# Altium PCB 2代PCB最终版.PcbDoc
Units mil, origin at the board's own origin, x right, y up, seen from the top; angles counter-clockwise.
Board outline 5567 x 2579 mil, 2 copper layers (Top Layer, Bottom Layer); 121 components, 134 nets, 408 pads, 77 vias.
Unrouted connection lines stored in the file: 58.
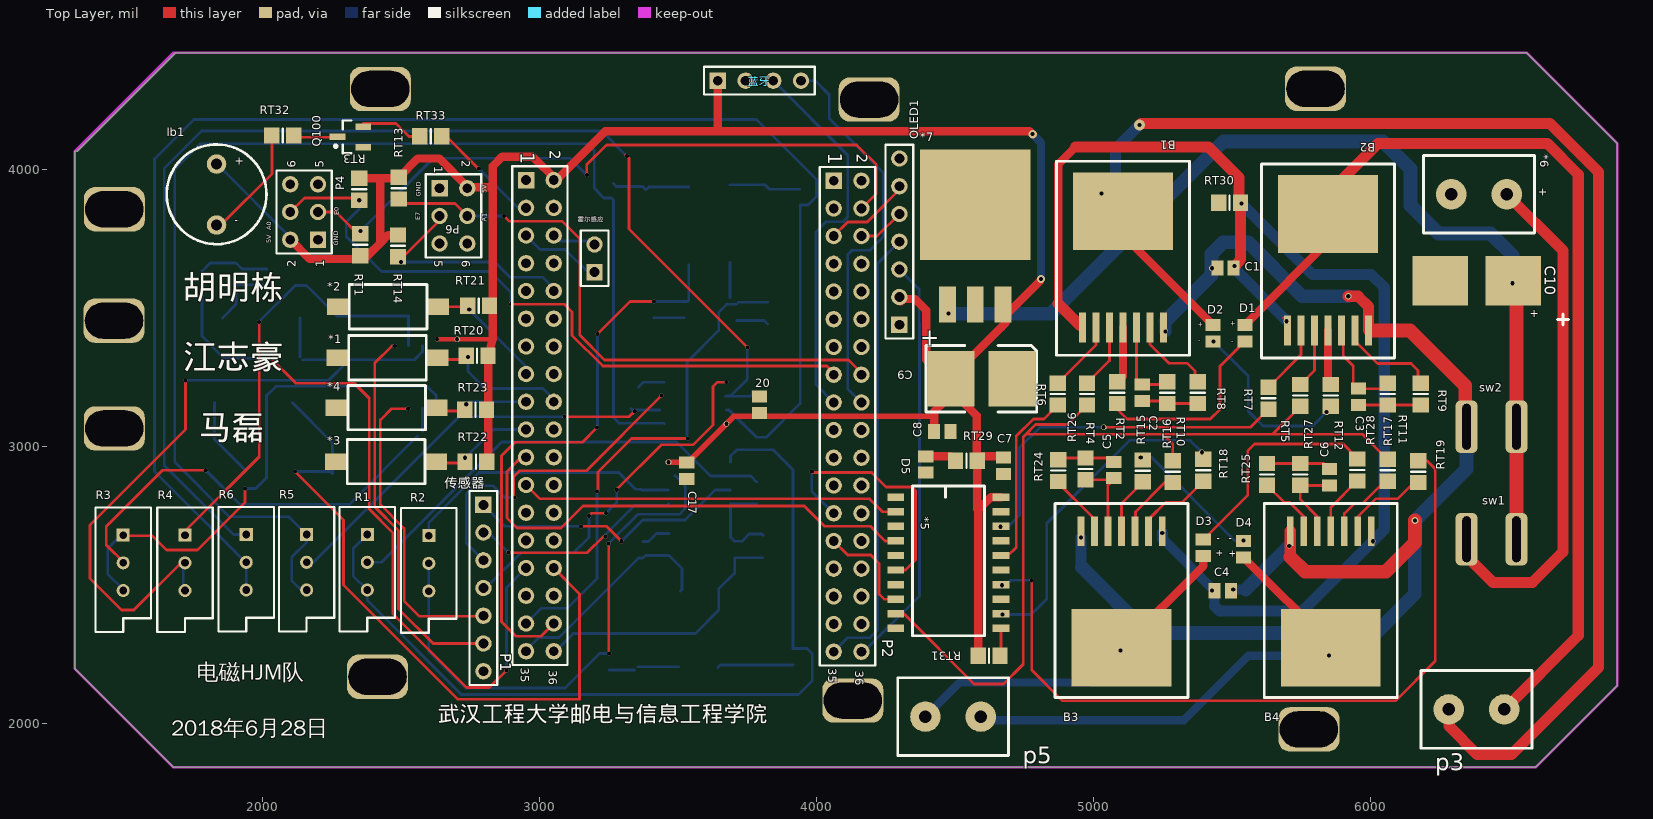
[diagram p0: Top Layer view]
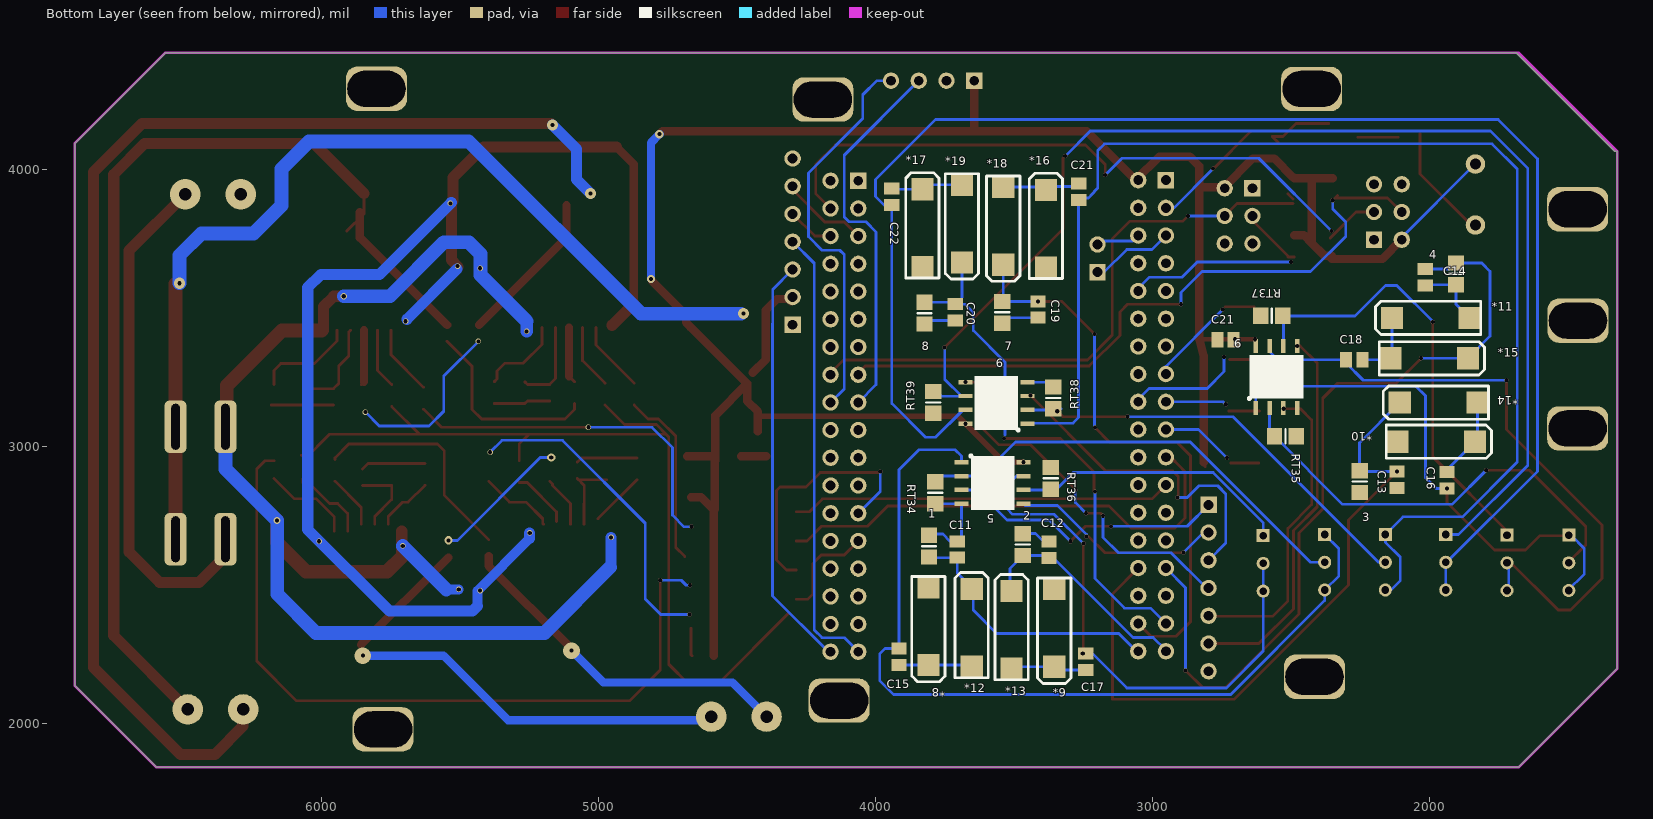
[diagram p1: Bottom Layer view, seen from below]

## Layer stack, top to bottom
Top Layer: signal copper 1.4
Dielectric: dielectric 12.6, FR-4, Dk 4.8
Bottom Layer: signal copper 1.4

## Board outline
1687,4422 1331,4066 1322,4066 1322,2200 1679,1843 6594,1843 6889,2138 6889,4094 6561,4422

## Design rules (kind name [scope] priority, off if disabled: settings)
Clearance [All] p1: gap=10
PolygonConnect [All] p1: connectstyle=Relief reliefconductorwidth=10 reliefentries=4 polygonreliefangle="90 Angle"
RoutingVias [All] p1: holewidth=28 width=50 viastyle="Through Hole" minholewidth=28 minwidth=50 maxholewidth=28 maxwidth=50
SilkscreenOverComponentPads [All] p1: minsilkscreentomaskgap=10
SolderMaskExpansion [All] p1: expansion=4
Width [All] p1: maxlimit=100 minlimit=10 preferedwidth=10
27 further rules are at their usual default settings.

## Components (designator, comment, footprint, x,y, rotation, side; value= is the part's Value field where it differs from the comment)
1 "3.3K" 6-0805_M 3806,2641 r270 bottom
2 "3.3K" 6-0805_M 3467,2647 r270 bottom
3 "3.3K" 6-0805_M 2252,2874 r90 bottom
4 "3.3K" 6-0805_M 1904,3624 r90 bottom
5 "运放1" opa2350 3577,2869 r180 bottom
6 "运放3" opa2350 2552,3252 r90 bottom
7 "3.3K" 6-0805_M 3541,3485 r90 bottom
8 "3.3K" 6-0805_M 3822,3482 r90 bottom
9 "运放2" opa2350 3562,3158 r0 bottom
20 "Cap Po13" C0805 3793,3152 r90 top
*1 "点按钮" 贴片按键 2271,3321 r0 top
*2 "点按钮" 贴片按键 2273,3505 r0 top
*3 "点按钮" 贴片按键 2266,2946 r0 top
*4 "点按钮" 贴片按键 2268,3141 r0 top
*5 "SN74LS244DW" 74lvc 4665,2818 r270 top
*6 "电源接线柱" 接线柱 6390,3911 r180 top
*7 "LM2940" 5vоƬ 4572,3873 r0 top
*8 "二极管" 二极管 3808,2452 r270 bottom
*9 "二极管" 二极管 3354,2446 r270 bottom
*10 "二极管" 二极管 2076,3018 r180 bottom
*11 "二极管" 二极管 1895,3465 r0 bottom
*12 "二极管" 二极管 3652,2246 r90 bottom
*13 "二极管" 二极管 3508,2239 r90 bottom
*14 "二极管" 二极管 1867,3159 r0 bottom
*15 "二极管" 二极管 2101,3319 r180 bottom
*16 "二极管" 二极管 3384,3687 r90 bottom
*17 "二极管" 二极管 3830,3689 r90 bottom
*18 "二极管" 二极管 3538,3897 r270 bottom
*19 "二极管" 二极管 3687,3905 r270 bottom
B1 "*BTN7971N" BTN7971 4965,3420 r0 top
B2 "*BTN7971N" BTN7971 5705,3410 r0 top
B3 "*BTN7971N" BTN7971 5240,2705 r180 top
B4 "*BTN7971N" BTN7971 5995,2705 r180 top
C1 "Cap Pol3" C0805 5475,3645 r0 top
C2 "Cap Pol3" C0805 5175,3195 r270 top
C3 "Cap Pol3" C0805 5955,3180 r270 top
C4 "Cap Pol3" C0805 5465,2480 r180 top
C5 "Cap Pol3" C0805 5072,2916 r90 top
C6 "Cap Pol3" C0805 5850,2890 r90 top
C7 "Cap Pol3" C0805 4674,2931 r270 top
C8 "Cap Pol3" C0805 4453,3055 r0 top
C9 "107钽电容" C107钽电容 4474,3245 r0 top
C10 "107钽电容" "syk220 25v电容" 6613,3599 r180 top
C11 "Cap Pol3" C0805 3704,2629 r90 bottom
C12 "Cap Pol3" C0805 3373,2628 r90 bottom
C13 "Cap Pol3" C0805 2117,2881 r270 bottom
C14 "Cap Pol3" C0805 2015,3612 r270 bottom
C15 "Cap Pol3" C0805 3914,2242 r270 bottom
C16 "Cap Pol3" C0805 1937,2879 r90 bottom
C17 "Cap Pol3" C0805 3240,2224 r270 bottom
C17 "Cap Pol9" C0805 3531,2913 r270 top
C18 "Cap Pol3" C0805 2272,3314 r180 bottom
C19 "Cap Pol3" C0805 3413,3495 r270 bottom
C20 "Cap Pol3" C0805 3711,3485 r270 bottom
C21 "Cap Pol3" C0805 3266,3920 r90 bottom
C21 "Cap Pol3" C0805 2736,3386 r0 bottom
C22 "Cap Pol3" C0805 3940,3902 r90 bottom
D1 "LED2" C0805 5545,3410 r270 top
D2 "LED2" C0805 5430,3410 r270 top
D3 "LED2" C0805 5395,2635 r90 top
D4 "LED2" C0805 5540,2630 r90 top
D5 "LED2" C0805 4393,2936 r270 top
lb1 "点按钮" 喇叭 1834,3811 r90 top
OLED1 "Header 7" HDR1X7 4298,3440 r90 top
P1 "Header 18X2" HDR2X18 2951,3962 r270 top
P2 "Header 18X2" HDR2X18 4061,3960 r270 top
p3 "电源接线柱" 接线柱 6381,2052 r180 top
P4 "编码器" HDR2X3 2200,3747 r90 top
p5 "电源接线柱" 接线柱 4492,2026 r180 top
P6 "编码器" HDR2X3 2639,3933 r270 top
Q100 "QNPN" SOT23_M 2317,4118 r180 top
R1 "RPot" VR5 2378,2583 r270 top
R2 "RPot" VR5 2600,2579 r270 top
R3 "RPot" VR5 1497,2581 r270 top
R4 "RPot" VR5 1720,2581 r270 top
R5 "RPot" VR5 2159,2583 r270 top
R6 "RPot" VR5 1941,2583 r270 top
RT1 "3.3K" 6-0805_M 2352,3729 r270 top
RT2 "3.3K" 6-0805_M 5085,3195 r270 top
RT3 "3.3K" 6-0805_M 2349,3929 r270 top
RT4 "3.3K" 6-0805_M 4975,3190 r90 top
RT5 "3.3K" 6-0805_M 5745,3185 r270 top
RT6 "3.3K" 6-0805_M 4870,3190 r90 top
RT7 "3.3K" 6-0805_M 5630,3175 r270 top
RT8 "3.3K" 6-0805_M 5375,3195 r90 top
RT9 "3.3K" 6-0805_M 6180,3190 r270 top
RT10 "3.3K" 6-0805_M 5265,3195 r90 top
RT11 "3.3K" 6-0805_M 6060,3190 r270 top
RT12 "3.3K" 6-0805_M 5855,3185 r90 top
RT13 "3.3K" 6-0805_M 2492,3933 r270 top
RT14 "3.3K" 6-0805_M 2489,3725 r90 top
RT15 "3.3K" 6-0805_M 5176,2913 r90 top
RT16 "3.3K" 6-0805_M 5285,2910 r270 top
RT17 "3.3K" 6-0805_M 6060,2915 r90 top
RT18 "3.3K" 6-0805_M 5395,2915 r270 top
RT19 "3.3K" 6-0805_M 6170,2910 r90 top
RT20 "3.3K" 6-0805_M 2774,3328 r180 top
RT21 "3.3K" 6-0805_M 2780,3509 r180 top
RT22 "3.3K" 6-0805_M 2770,2946 r180 top
RT23 "3.3K" 6-0805_M 2769,3134 r180 top
RT24 "3.3K" 6-0805_M 4871,2914 r270 top
RT25 "3.3K" 6-0805_M 5625,2900 r90 top
RT26 "3.3K" 6-0805_M 4970,2920 r270 top
RT27 "3.3K" 6-0805_M 5745,2900 r90 top
RT28 "3.3K" 6-0805_M 5950,2916 r270 top
RT29 "3.3K" 6-0805_M 4540,2949 r180 top
RT30 "3.3K" 6-0805_M 5490,3881 r0 top
RT31 "3.3K" 6-0805_M 4622,2246 r180 top
RT32 "3.3K" 6-0805_M 2073,4123 r180 top
RT33 "3.3K" 6-0805_M 2607,4120 r0 top
RT34 "1K" 6-0805_M 3783,2834 r270 bottom
RT35 "1K" 6-0805_M 2520,3038 r180 bottom
RT36 "1K" 6-0805_M 3366,2886 r270 bottom
RT37 "1K" 6-0805_M 2569,3472 r180 bottom
RT38 "1K" 6-0805_M 3357,3176 r90 bottom
RT39 "1K" 6-0805_M 3791,3160 r90 bottom
sw1 "船按钮" 船按键 6345,2566 r0 top
sw2 "船按钮" 船按键 6345,2972 r0 top
传感器 "Header 7" HDR1X7 2797,2790 r270 top
蓝牙 "Header 4" HDR1X4 3643,4321 r0 top
霍尔感应 "Header 2" HDR1X2 3198,3630 r90 top

## Footprints (in the part's own frame and the unit in brackets; to place one, negate y for a bottom-side part, rotate by r counter-clockwise, add the part's x,y. Pads: shape width x height; smd on the part's side, far side on the other; paste and mask are expansions set on the pad)
5vоƬ [mil]
  rect 60x130 smd: 1(-100,-360) 2(0,-360) 3(100,-360)
  rect 400x400 smd: 4(0,0)
6-0805_M [mm] "Chip Res"
  rect 1.4x1.5 smd: 1(-1,0) 2(1,0)
  silkscreen extent 0,-0.65 0,0.65, body extent -1.07,-0.7 1.07,0.7, height 0.7
74lvc [mil]
  rect 26.3x60 smd: 1(0,-380) 2(52.6,-380) 3(105.2,-380) 4(157.8,-380) 5(210.4,-380) 6(263,-380) 7(315.6,-380) 8(368.2,-380) 9(420.8,-380) 10(473.4,-380) 11(473.4,0) 12(420.8,0) 13(368.2,0) 14(315.6,0) 15(263,0) 16(210.4,0) 17(157.8,0) 18(105.2,0) 19(52.6,0) 20(0,0)
  silkscreen extent -40,-320 500,-60
BTN7971 [mil]
  rect 24.4x108 smd: 1(-6.4,10) 2(42.4,10) 3(91.2,10) 4(140,10) 5(188.8,10) 6(237.6,10) 7(286.4,10)
  rect 360x280 smd: 8(140,430)
  silkscreen extent -100,-90 380,610
C107钽电容 [mil]
  rect 170x200 smd: 1(11,0) 2(231,0)
  silkscreen extent -80,-120 320,120
C0805 [mm] "Chip Capacitor, Body 2.0x1.3"
  rect 1.1x1.4 smd: 1(-0.75,0) 2(0.75,0)
  body extent -1.1,-0.72 1.1,0.72, height 1.4
HDR1X2 [mm]
  rect 1.5x1.5 hole 0.9: 1(0,0)
  round 1.5 hole 0.9: 2(2.54,0)
  silkscreen extent -1.27,-1.27 3.81,1.27
HDR1X4 [mm]
  rect 1.5x1.5 hole 0.9: 1(0,0)
  round 1.5 hole 0.9: 2(2.54,0) 3(5.08,0) 4(7.62,0)
  silkscreen extent -1.27,-1.27 8.89,1.27
HDR1X7 [mm]
  rect 1.5x1.5 hole 0.9: 1(0,0)
  round 1.5 hole 0.9: 2(2.54,0) 3(5.08,0) 4(7.62,0) 5(10.16,0) 6(12.7,0) 7(15.24,0)
  silkscreen extent -1.27,-1.27 16.51,1.27
HDR2X3 [mm]
  rect 1.5x1.5 hole 0.9: 1(0,0)
  round 1.5 hole 0.9: 2(0,2.54) 3(2.54,0) 4(2.54,2.54) 5(5.08,0) 6(5.08,2.54)
  silkscreen extent -1.27,-1.27 6.35,3.81
HDR2X18 [mm]
  rect 1.5x1.5 hole 0.9: 1(0,0)
  round 1.5 hole 0.9: 2(0,2.54) 3(2.54,0) 4(2.54,2.54) 5(5.08,0) 6(5.08,2.54) 7(7.62,0) 8(7.62,2.54) 9(10.16,0) 10(10.16,2.54) 11(12.7,0) 12(12.7,2.54) 13(15.24,0) 14(15.24,2.54) 15(17.78,0) 16(17.78,2.54) 17(20.32,0) 18(20.32,2.54) 19(22.86,0) 20(22.86,2.54) 21(25.4,0) 22(25.4,2.54) 23(27.94,0) 24(27.94,2.54) 25(30.48,0) 26(30.48,2.54) 27(33.02,0) 28(33.02,2.54) 29(35.56,0) 30(35.56,2.54) 31(38.1,0) 32(38.1,2.54) 33(40.64,0) 34(40.64,2.54) 35(43.18,0) 36(43.18,2.54)
  silkscreen extent -1.27,-1.27 44.45,3.81
opa2350 [mil]
  rect 50x16 smd: 1(-112,75) 2(-112,25) 3(-112,-25) 4(-112,-75) 5(112,-75) 6(112,-25) 7(112,25) 8(112,75)
  silkscreen extent -82,-98 79,102
SOT23_M [mm] "SOT23, 3-Leads, Body 2.9x1.3mm, Pitch 0.95mm, Lead Span 2."
  rect 1.45x0.6 smd: 1(1.175,0) 2(-1.175,-0.95) 3(-1.175,0.95)
  silkscreen extent -0.1,-1.5 1.47,1.5, body extent -0.7,-1.5 0.7,1.5, height 1.1
"syk220 25v电容" [mil]
  rect 200x180 smd: 1(100,0) 2(363,0)
  silkscreen extent -100,120 -60,160
VR5 [mm]
  rect 1.2x1.2 hole 0.7: 1(-2.54,0)
  round 1.2 hole 0.7: 2(0,0) 3(2.54,0)
  silkscreen extent -5.08,-2.54 6.35,2.54
二极管 [mil]
  rect 80x80 smd: 1(-40,0) 2(240,0)
  silkscreen extent -80,-60 300,60
喇叭 [mil]
  round 70 hole 40: 1(-11,0) 2(209,0)
  silkscreen extent -80,-180 280,180
接线柱 [mil]
  round 110 hole 45: 1(-100,0) 2(100,0)
  silkscreen extent -200,-140 200,140
船按键 [mil]
  rrect50% 80x190 hole 30 slot 165 at 90 deg: 1(0,100) 2(180,100)
贴片按键 [mil]
  rect 80x60 smd: 1(0,0) 2(360,0)
  silkscreen extent 40,-80 320,80

## Part data
1 2 3 4 7 8 RT1 RT2 RT3 RT4 RT5 RT6 RT7 RT8 RT9 RT10 RT11 RT12 RT13 RT14 RT15 RT16 RT17 RT18 RT19 RT20 RT21 RT22 RT23 RT24 RT25 RT26 RT27 RT28 RT29 RT30 RT31 RT32 RT33 RT34 RT35 RT36 RT37 RT38 RT39: library part "Res Thermal", "Thermis"
5 6 9: library part Co
20 C17: library part "Cap Pol3", "Polarized Capacitor (Surface Mount)"
B1 B2 B3 B4: library part BTN7971N
C1 C2 C3 C4 C5 C6 C7 C8 C11 C12 C13 C14 C15 C16 C17 C18 C19 C20 C21 C21 C22: "Polarized Capacitor (Surface Mount)"
D1 D2 D3 D4 D5: "Typical RED, GREEN, YELLOW, AMBER GaAs LED"
OLED1: "Header,"
P1 P2: "Header, 18-Pin"
P4 P6: library part "Header 3X2", "Header, 3-Pin"
Q100: "NPN Bipolar Transistor"
R1 R2 R3 R4 R5 R6: "Pote"
蓝牙: "He"

## Free pads (board coordinates)
  rrect50% 220x160 hole 130 slot 210 at 0 deg: 0(5800,4292) 3(4189,4253) 4(2425,4291) 5(2415,2170) 6(4130,2084) 7(5776,1980) 8(1465,3857) 9(1464,3455) 10(1465,3066)

## Via types
v1: diameter 15, hole 15, Top Layer to Bottom Layer, 47 vias
v2: diameter 20, hole 15, Top Layer to Bottom Layer, 18 vias
v3: diameter 40, hole 15, Top Layer to Bottom Layer, 4 vias
v4: diameter 30, hole 15, Top Layer to Bottom Layer, 4 vias
v5: diameter 60, hole 15, Top Layer to Bottom Layer, 2 vias
v6: diameter 25, hole 15, Top Layer to Bottom Layer, 2 vias

## Nets (pads, with @x,y where several pads share a name; then routed paths per layer and width w, separated by ;. In a path a pad name is that pad's centre, name@x,y a point inside that pad or via, vN(x,y) a via of type N, cw(c..) or ccw(c..) an arc to the next point about the centre after c; other vN are vias at no path point)
3V3: P2.1
5V: 5.8 6.8 9.8 20.1 *5.20 *7.3 C7.1 C8.1 C9.1 C17.1@3531,2942.53 C21.1@2706.47,3386 lb1.2 OLED1.2 P1.2 P4.2 P6.2 RT1.2 RT3.1 RT13.1 RT14.2 RT20.1 RT21.1 RT22.1 RT23.1 RT29.1 RT31.2 蓝牙.1 | length 9086.9
  Top Layer w10: RT13.1@2488,3968.37 RT13.1 ; RT22.1 2809.37,2929 RT22.1@2820,2939.63 ; 2829.77,3388 2831,3388 ; RT29.1 RT29.1@4595.9,2965.53 ; *5.20@4664,2819 *5.20 ; 4675,3425 4675,3441 *7.3@4675,3481 ; C7.1@4679,2965.53 C7.1@4679.53,2965
  Top Layer w15: v1(2629,3388) 2829.77,3388
  Top Layer w20: v2(3465,2944) 3535,2944 v2(3674,3083) 3701,3110 4421,3110
  Top Layer w30: P4.2 2169.37,3677.63 RT1.2@2353,3677.63 ; RT3.1 RT13.1@2488,3968.37 ; RT1.2 2379.63,3689.63 2425,3735 ; 2425,3964.37 2425,3735 ; RT14.2@2488,3763.37 2453.37,3763.37 2425,3735 ; RT13.1 2559.63,4040 2638,4040 2742,3936 2831,3936 ; RT22.1@2815,2943 2815,3328 2829.77,3388 2831,3393 ; 2831,3388 2831,3393 ; 3643,4144 蓝牙.1 ; OLED1.2@4304,3525 4312,3533 4355,3533 4395,3493 4395,3314 C9.1@4442,3267 ; C8.1 4423.47,3126.42 4462,3164.95 C9.1@4462,3228 ; RT29.1@4577,2949 4577,3113 C9.1@4462,3228 ; 4579.37,2774.89 RT29.1 ; RT31.2 4582.63,2771.63 4629,2818 *5.20 ; RT29.1@4595.9,2965.53 C7.1@4679,2965.53 ; v4(4779,4128) 4768,4139 3237,4139 3060,3962 2975,4047 2865,4047 2831,4013 2831,3936 ; v4@4805.5,3597.5 4683,3475 4683,3449 4675,3441 C9.1@4462,3228 ; 2831,3393 2831,3936
  Bottom Layer w10: lb1.2@1834,4011 1844,4011 2100,3755 P4.2
  Bottom Layer w30: v4(4779,4128) 4778,4128 4809,4097 v4(4809,3605)
  other v2: 2702,3388
A0: P2.15 P4.4 RT3.2 | length 2479.5
  Top Layer w10: P4.4 2151,3898 2340.63,3898 RT3.2@2332.1,3906.53 ; RT3.2@2347.57,3893 2345.63,3893 v1(2349,3889.63) ; v1@2895,3516 v1(2897,3514) 3089,3514 3117,3486 3117,3402 3228,3291 4036,3291 P2.15@4061,3266
  Bottom Layer w10: v1(2349,3889.63) 2349,3858 2302,3811 2302,3759 2429,3632 2821,3632 2897,3556 v1(2897,3514) ; P2.15@4070,3251 P2.15@4070,3260
A1: P2.16 P6.4 RT13.2 | length 2164.6
  Top Layer w10: RT13.2@2492,3877.53 2694.47,3877.53 P6.4 ; RT13.2 RT13.2@2510.9,3912.53 ; v1(2871,3833) 2890,3814 3080,3814 3145,3749 3145,3402.28 3234.28,3313 4114.53,3313 P2.16@4170,3257.53
  Bottom Layer w10: P6.4 v1(2871,3833)
A2: P2.17 蓝牙.3 | length 1382.3
  Bottom Layer w10: 蓝牙.3 4112,4052 4112,3829 4095,3812 4034,3812 3997,3775 3997,3224 P2.17
A3: P2.18 蓝牙.4 | length 1425.5
  Bottom Layer w10: 蓝牙.4 3994,4321 4045,4270 4045,4184 4241,3988 4241,3758 4192,3709 4128,3709 4112,3693 4112,3209 P2.18
A4: P2.2
A6: P2.29
A7: P2.30
B0: P2.33
B1: P2.34
B2: OLED1.3 P2.36 | length 1500.7
  Bottom Layer w10: P2.36 4169.28,2260 4371,2461.72 4371,3445 ; OLED1.3 4370,3568 4370,3446
B3: OLED1.4 P2.35 | length 1625
  Bottom Layer w10: P2.35 4112,2311 4192,2311 4220,2339 4220,3662 OLED1.4
B4: P1.22
B5: P1.20
C0: 3.2 *14.2 C13.1 P1.30 | length 2471.3
  Top Layer w10: v1(2117,2910.53) 2292,2735.53 2292,2501 2704,2089 3144,2089 3144,2469 P1.30
  Bottom Layer w10: *14.2 2252,3014 3.2 2252,2902.37 2243.84,2910.53 v1(2117,2910.53)
C1: 4.2 *15.2 C14.1 P1.29 | length 2943.9
  Top Layer w10: v1(2030,3319) 2120,3229 2331,3229 2385,3175 2385,2775 2471,2689 2471,2396 2736,2131 2818,2131 v1(2880,2193)
  Bottom Layer w10: C14.1 1925.84,3641.53 4.2 1811.37,3663.37 1781,3633 1781,3399 *15.2 v1(2030,3319) ; v1(2880,2193) 2880,2491 P1.29
C2: *5.2 P1.23 | length 1385
  Top Layer w10: P1.23 3001,2812 4190,2812 4236.6,2765.4 *5.2 ; P1.23@2960,2862 P1.23@2960,2872.94
C3: *5.4 P1.21 | length 1760.5
  Top Layer w10: P1.21 2933.72,2962 2898.24,2926.53 2898.19,2926.53 2886.47,2914.81 2886.47,2914.76 2882.47,2910.76 2882.47,2742.53 2918.47,2706.53 3076.71,2706.53 3156.18,2786 3955,2786 4028,2713 4194,2713 4246.8,2660.2 *5.4
C4: P2.8
C5: P2.7
C6: P2.13
C7: P2.14
D0: P1.6 霍尔感应.2 | length 160.3
  Bottom Layer w10: P1.6 3071,3742 3186,3742 霍尔感应.2
D1: P1.5 霍尔感应.1 | length 301.7
  Bottom Layer w10: P1.5 3001,3712 3092,3712 3174,3630 霍尔感应.1
D2: P2.19
D3: P2.20
D4: P2.21
D5: P1.26
D6: P1.25
D7: P1.24
E0: P2.4 P4.3 RT1.1 | length 2470.2
  Top Layer w10: P4.3 2264.37,3847 RT1.1@2358,3753.37 ; v1(3170,3980) 3170,4018 3241,4089 4144,4089 4215,4018 4215,3914 P2.4
  Bottom Layer w10: v1(2353,3778) 2616,4041 3109,4041 v1(3170,3980)
E1: P2.3
E2: P1.4
E3: P1.3 RT33.2 | length 417.7
  Top Layer w10: RT33.2@2645.37,4137 2778.37,4004 v1(2781,4004)
  Bottom Layer w10: v1@2782,4002 2922,3862 P1.3
E4: P2.28
E5: *3.2 P1.19 RT22.2 | length 371.9
  Top Layer w10: *3.2@2616,2941 RT22.2@2716.63,2941
  Bottom Layer w10: v1(2731,2960) 2833,3062 P1.19@2960,3062
E6: *4.2 P1.17 RT23.2 | length 340.4
  Top Layer w10: *4.2@2613,3129 RT23.2@2724.63,3129
  Bottom Layer w10: v1(2735,3153) 2744,3162 P1.17@2960,3162
E7: P1.10 P6.3 RT14.1 | length 823.3
  Top Layer w10: RT14.1@2488,3684.63 RT14.1@2510.63,3684.63 ; RT14.1@2507,3685 P6.3@2646,3824
  Bottom Layer w10: v1(2499,3667) 2838,3667 2892,3613 ; 2892,3612 3010,3612 P1.10@3060,3562
EN: *5.9 RT4.1 RT5.2 RT16.1 RT17.2 | length 3264.4
  Top Layer w10: *5.9@4314.8,2397.2 4568,2144 4674,2144 4745,2215 4745,3035 4755,3045 ; RT4.1 4904.37,3080 4790,3080 4755,3045 ; RT16.1 5285,3010 5250,3045 ; RT5.2 5644.37,3045 ; RT17.2 5969.37,3045 5644.37,3045 ; RT17.2@6065,2964.37 RT17.2@6070,2969.37 ; 4755,3045 5250,3045 ; 5250,3045 5644.37,3045
F0: P2.22
F1: P2.23
F2: P2.31
F3: P2.32
F4: 1.2 *12.2 C11.1 P1.36 | length 969.6
  Bottom Layer w10: P1.36 3057.07,2262 3121.07,2326 3562,2326 3646,2410 3646,2486 3704,2544 C11.1 1.2@3803.84,2599.47
F5: 2.2 *13.2 C12.1 P1.35 | length 812.1
  Bottom Layer w10: P1.35 2951,2266 2997,2312 3070,2312 3356.47,2598.47 C12.1 3382.16,2607.63 2.2 3514,2560.63 3514,2485 *13.2
F6: 7.2 *18.2 C19.1 P1.34 | length 2058.2
  Top Layer w10: P1.34 3005,2316 2915,2316 2862.47,2368.53 2862.47,2967.47 2911,3016 3154,3016 v1(3207,3069) ; v1(3209,3407) 3326.53,3524.53 v1(3413,3524.53)
  Bottom Layer w10: v1(3207,3069) 3209,3071 v1(3209,3407) ; v1(3413,3524.53) 7.2@3535.16,3524.53 ; 7.2@3538,3527.37 *18.2
F7: 8.2 *19.2 C20.1 P1.33 | length 1879.7
  Top Layer w10: v1@3211,2839 3211,2909 3332,3030 v1(3535,3030)
  Bottom Layer w10: P1.33 3006.47,2417.47 3100.47,2417.47 3207,2524 v1(3207,2839) ; 3532,3042 3532,3305 3646,3419 3646,3484 3676.53,3514.53 C20.1 ; 3687,3538.53 *19.2 ; C20.1@3717.84,3521.37 8.2
G0: P2.9
G1: P2.10
G2: P2.11
G3: P2.12
G4: P2.24
G5: P2.26
G6: *5.6 P2.25 | length 921.8
  Top Layer w10: v1(3982,2910) 3985.18,2906.82 4198.18,2906.82 4250,2855 4343,2855 4356,2842 4356,2591 4320,2555 *5.6
  Bottom Layer w10: v1(3982,2910) 3982,2839 P2.25
G7: *5.8 P2.27 | length 386.1
  Top Layer w10: P2.27 4112,2609 4195,2609 4225,2579 4225,2468 4243.2,2449.8 *5.8 ; P2.27@4070,2660 P2.27@4070,2670
GND: 1.1 2.1 3.1 4.1 5.4 6.4 7.1 8.1 9.4 20.2 *1.1 *2.1 *3.1 *4.1 *5.1 *5.3 *5.5 *5.7 *5.10 *5.13 *5.15 *5.17 *5.19 *6.2 *7.2 *7.4 *8.1 *9.1 *10.1 *11.1 *16.1 *17.1 C2.2 C3.2 C5.2 C6.2 C7.2 C8.2 C9.2 C10.2 C11.2 C12.2 C13.2 C14.2 C17.2@3531,2883.47 C19.2 C20.2 C21.2@2765.53,3386 D5.2 OLED1.1 OLED1.7 P1.1 P4.1 P6.1 Q100.3 RT8.1 RT9.2 RT10.1 RT11.2 RT24.1 RT25.2 RT26.1 RT27.2 RT30.1 RT34.2 RT35.2 RT36.1 RT37.1 RT38.2 RT39.1 传感器.7 蓝牙.2 | length 1913.2
  Top Layer w10: RT24.1@4860,2959.37 RT26.1 5060.16,2959.37 C5.2@5075,2944.53 ; C2.2 5255.16,3165.47 RT10.1 RT8.1 ; RT25.2 RT27.2 5830.16,2939.37 C6.2 ; C3.2 RT9.2@6179.84,3150.47
  Bottom Layer w10: *11.1 1904,3514 4.1 C14.2@2012.84,3584.63 ; RT38.2 3374.63,3233 9.4 ; C12.2 3392.53,2657.53 3422,2687 3466.37,2687 2.1 ; C19.2 7.1@3521.16,3465.47 ; C20.2 3809.16,3455.47 8.1 ; RT34.2@3782.37,2794 5.4 3689,2673.53 C11.2 3729.53,2658.53 3756,2685 3801.37,2685 1.1
GND1: B1.1 B2.1 B3.1 B4.1 C1.2 C4.2 RT30.2 | length 4546.6
  Top Layer w10: RT30.2@5524,3886.37 RT30.2 ; 5684,3465 5695,3454 v2(5695,3453)
  Top Layer w30: 4871,3517.6 4871,4019 4934,4082
  Top Layer w40: 4871,3517.6 B1.1@4950.3,3438.3 ; 4934,4082 5413,4082 5524,3971 RT30.2@5524,3886.37 ; C1.2@5505,3649 5529.37,3673.37 RT30.2
  Bottom Layer w35: 5247,2668.47 5435.47,2480 5435.47,2425.53
  Bottom Layer w40: 5247,2668.47 v2(5247,2689) ; 5435.47,2425.53 5454,2407 5753,2407 6048,2702 6048,3574 6000,3622 5789,3622 v2@5530,3881 ; 5509,3641 v2@5690,3460
  other v2: 5426,2481 6007,2659 5507,3652 5533,3878
H0: *1.2 P1.18 RT20.2 | length 507.8
  Top Layer w10: *1.2@2631,3315 RT20.2@2721.63,3315
  Bottom Layer w10: v1(2741,3324) 2741,3271 2802,3210 3012,3210 P1.18@3060,3162
H1: *2.2 P1.15 RT21.2 | length 421.5
  Top Layer w10: *2.2 RT21.2@2736.63,3505
  Bottom Layer w10: v1(2746,3495) 2951,3290 P1.15
H2: P1.11
H3: P1.32
H4: P1.31
H5: P1.9
H6: P1.8
H7: P1.7
I0: P1.16
I1: P1.13
I2: OLED1.5 P2.6 | length 170.1
  Top Layer w10: P2.6 4218,3760 OLED1.5
I3: OLED1.6 P2.5 | length 315.4
  Top Layer w10: P2.5 4112,3811 4182,3811 OLED1.6@4304.5,3933.5
I4: P1.14
I5: P1.27
I6: P1.28
IN1: *5.18 RT7.2 | length 1285.8
  Top Layer w10: v2(5035,3070) 5564.37,3070 RT7.2
  Bottom Layer w10: v1(4663,2711) 4690,2711 4732,2753 4732,2997 4805,3070 v2(5035,3070)
IN2: *5.16 RT6.1 | length 644.5
  Top Layer w10: *5.16@4687,2604 4720,2637 4720,3038.28 4781.72,3100 4819.37,3100 RT6.1
IN3: *5.14 RT19.2 | length 2767.7
  Top Layer w10: v1(4776,2518) 4776,2194 4887,2083 6088,2083 6232,2227 6232,2919 6201.63,2949.37 RT19.2
  Bottom Layer w10: v1(4668,2500) 4682,2500 4700,2518 v1(4776,2518)
IN4: *5.12 RT18.1 | length 1157.9
  Bottom Layer w10: v1(4670,2395) 4774,2395 4830,2451 4830,2724 5129,3023 5347,3023 v2(5390,2980)
INP1: 5.3 传感器.1 | length 1015.3
  Top Layer w10: 3157,2713 3241,2713 v1(3295,2659)
  Bottom Layer w10: 传感器.1 2874,2713 3148,2713 v1(3149,2712) ; v1(3295,2659) 3372,2736 3524.28,2736 3632.28,2844 5.3
INP2: 5.5 传感器.2 | length 775
  Top Layer w10: v1@2888,2617.47 3171.47,2617.47 3230,2676 v1(3237,2676)
  Bottom Layer w10: 传感器.2 2816,2690 v1(2888,2618) ; v1(3237,2676) 3237,2683 3342,2788 3459,2788 5.5
INP3: 9.3 传感器.3 | length 1199.3
  Top Layer w10: v1@2906.53,2817 2906.53,2843.5 2906.47,2843.56 2906.47,2880.44 2906.53,2880.5 2906.53,2892.53 2927,2913 3168,2913 v1(3440,3185)
  Bottom Layer w10: 传感器.3 2735,2652 2735,2830 2764,2859 2832,2859 2874,2817 v1(2909,2817)
INP4: 9.5 传感器.4 | length 1338.2
  Top Layer w10: v1(3178,2751) 3187,2760 v1(3239,2760) ; v1(3278,2845) 3440.5,3007.5 3554.5,3007.5 3626,3079 3626,3217 3642,3233 v1(3674,3233)
  Bottom Layer w10: 传感器.4 2804.82,2490 2932.29,2617.47 3122.47,2617.47 3178,2673 v1(3178,2751) ; v1(3239,2760) 3278,2799 v1(3278,2845)
INP5: 6.3 传感器.5 | length 1116.8
  Top Layer w10: v1(2526,3137) 2465,3137 2425,3097 2425,2791.57 2511,2705.57 2511,2443 2566,2388 2795,2388 传感器.5
INP6: 6.5 传感器.6 | length 1378.1
  Top Layer w10: v1(2477,3364) 2467,3364 2405,3302 2405,2783.28 2491,2697.28 2491,2415 2616,2290 传感器.6
Net5_1: 5.1 C15.1 R1.1 R1.3 | length 3153.3
  Bottom Layer w10: R1.1 2327,2632 2327,2534 R1.3 2378,2445 2717,2106 3934,2106 3984,2156 3984,2252 3964.47,2271.53 C15.1 3914,2917 3842,2989 3712,2989 3689,2966 5.1
Net5_2: 5.2 R1.2 RT34.1 | length 1645.1
  Bottom Layer w10: R1.2 2429.54,2583 2580,2733.46 2580,2734.28 2863.19,3017.47 3493.53,3017.47 3617,2894 5.2 3762.37,2894 RT34.1
Net5_6: 5.6 R2.1 RT36.2 | length 1006.7
  Bottom Layer w10: R2.1@2600,2685 2600,2726 2780.53,2906.53 3285.47,2906.53 3345.37,2846.63 RT36.2 3368.63,2844 5.6
Net5_7: 5.7 C17.1@3240,2253.53 R2.2 R2.3 | length 1941.5
  Top Layer w10: v1(3249,2651) 3249,2255.53 v1(3251,2253.53)
  Bottom Layer w10: R2.2@2600,2585 R2.2 R2.3 2600,2262 2733,2129 3092,2129 3216.53,2253.53 v1(3251,2253.53) ; v1(3249,2651) 3354,2756 3504,2756 3525,2777 3525,2805 3525,2859 5.7@3488,2896
Net6_1: 6.1 C16.1 R3.1 R3.3 | length 1912.1
  Top Layer w10: R3.1@1503,2679 1601,2679 1653,2627 1765,2627 1937,2799 v1(1937,2849.47)
  Bottom Layer w10: R3.3@1503,2479 1441,2541 1441,2632 1488,2679 R3.1@1503,2679 ; v1(1937,2849.47) 1975.47,2849.47 2014,2888 2014,3184 2048,3218 2594,3218 2627,3185 6.1
Net6_2: 6.2 R3.2 RT35.1 | length 1605.4
  Top Layer w10: R3.2@1503,2579 1436,2646 1436,2712 1639,2915 v1(1795,2915)
  Bottom Layer w10: v1(1795,2915) 1917.93,2792.07 2313.44,2792.07 RT35.1 ; RT35.1@2577,3055.63 6.2
Net6_6: 6.6 R4.1 RT37.2 | length 1622.7
  Top Layer w10: R4.1@1714,2690 1988,2964 v1(1988,3450)
  Bottom Layer w10: v1@1986,3450 2118,3582 2159,3582 2269,3472 2527,3472 6.6
Net6_7: 6.7 C18.1 R4.2 R4.3 | length 2341.6
  Top Layer w10: R4.2@1714,2590 1535,2411 1491,2411 1377,2525 1377,2717 1722,3062 v1(1722,3240)
  Bottom Layer w10: R4.3@1714,2490 R4.2@1714,2590 ; v1(1722,3240) 2238.9,3240 2301.53,3302.63 C18.1 2548,3314 2577,3343 6.7
Net9_1: 9.1 C21.1@3266,3890.47 R5.1 R5.3 | length 4661
  Bottom Layer w10: R5.3 2139,2483 2105,2517 2105,2601 2159,2655 R5.1 2095,2747 1881,2747 1683,2945 1683,4002 1774,4093 3173,4093 3197,4069 3197,3934.5 3222,3906 3230,3898 3258.47,3898 3266,3890.47 3266,3105 3286,3085 3448,3085 9.1
Net9_2: 9.2 R5.2 RT38.1 | length 1517.1
  Top Layer w10: v1@3088,3106 v1(3090,3108) 3323,3108 v1(3343,3128)
  Bottom Layer w10: R5.2 2184,2583 2709,3108 v1(3090,3108) ; RT38.1@3330,3136.63 3333.63,3133 9.2@3433,3133
Net9_6: 9.6 R6.1 RT39.2 | length 4431.3
  Top Layer w10: v1@3310,4053 v1(3314,4049) 3322,4041 3322,3786 v1(3750,3358)
  Bottom Layer w10: R6.1@1942,2683 1895,2683 1645,2933 1645,4004 1780,4139 3224,4139 v1(3314,4049) ; 9.6@3670.37,3182 3761,3182 3767,3188 RT39.2@3767,3200.37 ; 9.6 3689,3183 3749,3243 v1@3749,3352
Net9_7: 9.7 C22.1 R6.2 R6.3 | length 5422.6
  Bottom Layer w10: R6.2@1939.5,2581.5 1610,2911 1610,4039 1752,4181 3782,4181 3999,3964 3999,3903 3968.47,3872.47 C22.1 3940,3156 3818,3034 3782,3034 9.7@3686,3130 ; R6.3@1941,2503 R6.2 ; 9.7 3683,3133 9.7@3686,3130 ; 9.7@3683,3130 9.7@3686,3130 ; 9.7@3687.21,3130 9.7@3686,3130
Net*5_11: *5.11 RT31.1 | length 100.1
  Top Layer w10: RT31.1 4665,2249.63 *5.11
Net*6_1: *6.1 sw1.1 | length 1868.4
  Top Layer w40: sw1.1 6345,2605 6440,2510 6582,2510 6693,2621 6693,3708 *6.1
Net*8_2: *8.2 *12.1 C15.2 | length 273.6
  Bottom Layer w10: *12.1@3643.47,2203.47 3646,2206 3652,2212 *8.2 ; *8.2@3808.47,2212.47 C15.2
Net*9_2: *9.2 *13.1 C17.2@3240,2194.47 | length 238.5
  Bottom Layer w10: C17.2@3251,2194.47 *9.2@3342.47,2194.47 ; *9.2 *13.1@3501,2206
Net*10_2: *10.2 *14.1 C16.2 | length 296
  Bottom Layer w10: *14.1 1827,3027 *10.2 1937,2917 C16.2
Net*11_2: *11.2 *15.1 C18.2 | length 236.5
  Bottom Layer w10: *15.1@2135,3325 *11.2 ; *15.1@2146,3314 C18.2
Net*16_2: *16.2 *18.1 C21.2@3266,3949.53 | length 285.5
  Bottom Layer w10: C21.2@3266,3949.53 3276.53,3939 3372,3939 *16.2 3394,3937 *18.1
Net*17_2: *17.2 *19.1 C22.2 | length 257.1
  Bottom Layer w10: *19.1 3814,3945 *17.2 C22.2@3937.47,3929
NetB1_2: B1.2 RT6.2 | length 257.5
  Top Layer w10: RT6.2 5007.4,3366.77 B1.2
NetB1_3: B1.3 RT4.2 | length 234.3
  Top Layer w10: RT4.2 5056.2,3310.57 B1.3
NetB1_5: B1.5 C2.1 RT10.2 | length 308.3
  Top Layer w10: B1.5 5153.8,3245.73 C2.1 5255.16,3224.53 RT10.2
NetB1_6: B1.6 RT8.2 | length 305.7
  Top Layer w10: B1.6 5202.6,3369.4 5270.37,3301.63 5336.37,3301.63 5365,3273 5365,3244.37 RT8.2
NetB2_2: B2.2 RT7.1 | length 254.3
  Top Layer w10: RT7.1 5747.4,3331.77 B2.2
NetB2_3: B2.3 RT5.1 | length 216.8
  Top Layer w10: RT5.1 5796.2,3275.57 B2.3
NetB2_5: B2.5 C3.1 RT11.1 | length 349
  Top Layer w10: B2.5 5900,3413.8 5900,3328 5936,3292 5936,3228.53 C3.1 6040.16,3209.53 RT11.1
NetB2_6: B2.6 RT9.1 | length 360.1
  Top Layer w10: B2.6 5942.6,3381.39 6023.99,3300 6145,3300 6170,3275 RT9.1@6170,3225
NetB3_2: B3.2 RT18.2 | length 272.2
  Top Layer w10: B3.2@5197.6,2720 5200,2722.4 5200,2740 5260,2800 5319.37,2800 RT18.2
NetB3_3: B3.3 RT16.2 | length 213.8
  Top Layer w10: B3.3@5150,2730 5150,2765 5255.63,2870.63 RT16.2
NetB3_5: B3.5 C5.1 RT26.2 | length 283.3
  Top Layer w10: RT26.2 5070.16,2880.63 5075,2885.47 5050,2860.47 5050,2795 5051.2,2793.8 B3.5@5051.2,2720
NetB3_6: B3.6 RT24.2 | length 198.4
  Top Layer w10: RT24.2@4860,2880.63 B3.6@5000.31,2740.31
NetB4_2: B4.2 RT19.1 | length 327.2
  Top Layer w10: B4.2 5952.6,2747.6 6017.5,2812.5 6096.87,2812.5 RT19.1@6170,2885.63
NetB4_3: B4.3 RT17.1 | length 288.2
  Top Layer w10: B4.3 5903.8,2758.8 5940,2795 5969.37,2795 RT17.1@6060,2885.63 ; RT17.1@6065,2870 RT17.1@6065,2885.63
NetB4_5: B4.5 C6.1 RT27.1 | length 271
  Top Layer w10: B4.5@5806.2,2720 5806.2,2748.8 5745,2810 RT27.1 5745.16,2860.47 C6.1
NetB4_6: B4.6 RT25.1 | length 206.8
  Top Layer w10: RT25.1 5685.63,2800 5705,2800 5757.4,2747.6 B4.6@5757.4,2720
NetD1_2: D1.2 RT2.2 | length 702.4
  Top Layer w10: RT2.2 5085,3135 5120,3100 5420,3100 5455,3135 5455,3290.47 D1.2
NetD2_2: D2.2 RT12.1 | length 629.4
  Bottom Layer w10: v2(5432,3380) 5557,3255 5557,3128 5610,3075 5790,3075 v2(5840,3125)
NetD3_2: D3.2 RT28.1 | length 818.4
  Top Layer w10: D3.2 5555,2824.53 5555,2985 5580,3010 5900,3010 5950,2960 RT28.1@5950,2954.37
NetD4_2: D4.2 RT15.2 | length 494.8
  Bottom Layer w10: v4(5169,2961) 5209,2961 5508,2662 v4(5540,2662)
NetD5_1: D5.1 RT29.2 | length 91.1
  Top Layer w30: D5.1 RT29.2@4484.1,2965.53
Netlb1_1: lb1.1 RT32.2 | length 416.9
  Top Layer w10: lb1.1@1834,3811 1860,3811 2033.63,3984.63 RT32.2@2033.63,4130
NetQ100_1: Q100.1 RT32.1 | length 144.4
  Top Layer w10: RT32.1@2113.37,4117 Q100.1@2257.74,4117
NetQ100_2: Q100.2 RT33.1 | length 254.7
  Top Layer w10: Q100.2@2363.26,4166.4 2481.6,4166.4 2528,4120 RT33.1 RT33.1@2545.63,4098
OUT1: B2.4 B2.8 D1.1 p3.1 RT12.2 | length 3963.5
  Top Layer w10: RT12.2@5845,3234.37 RT12.2 ; B2.8@5845,3914 B2.8 B2.8@5907,3778
  Top Layer w30: D1.1 5860,3754.53 B2.8@5860,3846 ; RT12.2@5845,3234.37 B2.4
  Top Layer w40: B2.8@5845,3914 6025,4094 6637,4094 6748,3983 6748,2319 p3.1
OUT2: B1.4 B1.8 D2.1 p3.2 RT2.1 | length 5352.8
  Top Layer w10: RT2.1 RT2.1@5105,3254.37
  Top Layer w30: RT2.1@5105,3254.37 B1.4 ; B1.8@5114,3871 5114,3755.53 D2.1
  Top Layer w40: v3@5171,4167 6646,4167 6821,3992 6821,2204 6507,1890 6383,1890 6281,1992 p3.2
  Bottom Layer w40: v3(5028,3914) 5078,3964 5078,4074 v3(5165,4161)
OUT3: B4.4 B4.8 D4.1 p5.1 RT28.2 | length 2009.8
  Top Layer w10: B4.8 B4.8@5855,2285.47 ; B4.4@5855,2720 5855,2780.63 RT28.2@5950,2875.63
  Top Layer w30: D4.1 B4.8@5855,2285.47
  Bottom Layer w10: p5.1 p5.1@4605,2013
  Bottom Layer w30: p5.1@4605,2013 5325,2013 5558,2246 v5(5849,2246)
OUT4: B3.4 B3.8 D3.1 p5.2 RT15.1 | length 1441.9
  Top Layer w10: B3.4@5100,2720 5100,2795 5165,2860 5165,2865.63 RT15.1@5175,2875.63
  Top Layer w30: B3.8 5395,2570 D3.1
  Bottom Layer w30: p5.2 4515,2149 4981,2149 v5(5096,2264)
REF: P1.12
V72: *7.1 C10.1 sw1.2 sw2.2 | length 3576.4
  Top Layer w10: sw2.2 sw2.2@6525,3075.89
  Top Layer w40: sw2.2@6528.93,3071.96 sw2.2@6529,3078
  Top Layer w50: C10.1 6525,3587 sw2.2@6525,3075.89 ; sw1.2 sw2.2
  Bottom Layer w50: v3@4484,3480 4846,3480 5467,4101 6044,4101 6143,4002 6143,3870 6243,3770 6432,3770 6511,3691 v3(6511,3590)
  other v3: 4475,3481
V72B: B1.7 B2.7 B3.7 B4.7 C1.1 C4.1 sw2.1 | length 4785.7
  Top Layer w10: sw2.1@6340,3077 sw2.1
  Top Layer w40: 5708.6,2602.4 B4.7 ; v6(5918,3543) 5954,3543 5991.4,3505.6 B2.7
  Top Layer w50: 5708.6,2602.4 5762,2549 6054,2549 6159,2654 v6(6159,2734) ; B2.7@5997.4,3420 6141,3420 6340,3221 sw2.1@6340,3077
  Bottom Layer w10: v6@6158,2733 v6(6159,2734)
  Bottom Layer w35: v2(5503,2485) 5548,2485
  Bottom Layer w40: 4953,2565 v2(4953,2673)
  Bottom Layer w45: v2(5258,3416) 5258,3453
  Bottom Layer w50: 4957,2565 5194,2328 6018,2328 6158,2468 v6@6158,2733 ; 5258,3453 5425,3620 5425,3696 5461,3732 ; 5466,3738 5556,3738 5751,3543 v6(5918,3543) ; 5548,2485 v2(5705,2642) ; v6(6159,2734) 6345,2920 sw2.1
  other v2: 5426,3644
pads on no net: P4.5 P4.6 P6.5 P6.6

## Keep-outs
Keep-Out Layer:
  lines w10: 1322,2200 1322,4066 1678,4422 6561,4422 6889,4094 6889,2138 6594,1843 1679,1843 1322,2200

## Silkscreen, mask and mechanical layers (free items; w line width, h text height)
Top Overlay:
  text "+" at 1899,4007 h50
  text "5V" at 2816,3914 h30 r90
  text "GND" at 2578,3902 h30 r90
  text "+" at 6603,3895 h50
  text "E0" at 2283,3835 h30 r90
  text "E7" at 2576,3818 h30 r90
  text "A1" at 2816,3811 h30 r90
  text "-" at 1899,3797 h40
  text "A0" at 2039,3782 h30 r90
  text "5V" at 2038,3734 h30 r90
  text "GND" at 2280,3726 h30 r90
  text "胡明栋" at 1714,3504 h150
  text "+" at 6573,3456 h50
  text "+" at 5492,3430 h30
  text "+" at 5375,3426 h30
  text "-" at 5377,3370 h30
  text "-" at 5496,3365 h30
  text "江志豪" at 1713,3252 h150
  text "马磊" at 1766,2997 h150
  text "-" at 5443,2650 h40
  text "-" at 5487,2649 h40
  text "+" at 5440,2595 h40
  text "+" at 5487,2594 h40
  text "电磁HJM队" at 1762,2140 h100
  text "武汉工程大学邮电与信息工程学院" at 2633,1987 h100
  text "2018年6月28日" at 1671,1938 h100

## Text inside footprints (layer, text, board x,y; h text height)
C9: Top Overlay "+" at 4374,3365 h60
P1: Top Overlay "2" at 3036,4070 h40 r270; Top Overlay "1" at 2931,4062 h50 r270; Top Overlay "35" at 2931,2202 h30 r270; Top Overlay "36" at 3032,2193 h30 r270
P2: Top Overlay "2" at 4144,4058 h40 r270; Top Overlay "1" at 4041,4060 h50 r270; Top Overlay "35" at 4041,2200 h30 r270; Top Overlay "36" at 4138,2192 h30 r270
P4: Top Overlay "6" at 2120,4007 h30 r90; Top Overlay "5" at 2220,4007 h30 r90; Top Overlay "2" at 2120,3647 h30 r90; Top Overlay "1" at 2222,3648 h30 r90
P6: Top Overlay "6" at 2719,3673 h30 r270; Top Overlay "5" at 2619,3673 h30 r270; Top Overlay "2" at 2719,4033 h30 r270; Top Overlay "1" at 2619,4013 h30 r270